# Altium PCB Mounting_PCB_B.PcbDoc
Units mm, origin at the board's own origin, x right, y up, seen from the top; angles counter-clockwise.
Board outline 41.5 x 73 mm, 2 copper layers (Top Layer, Bottom Layer), stack 0.325 mm thick; 70 components, 59 nets, 258 pads, 0 vias.
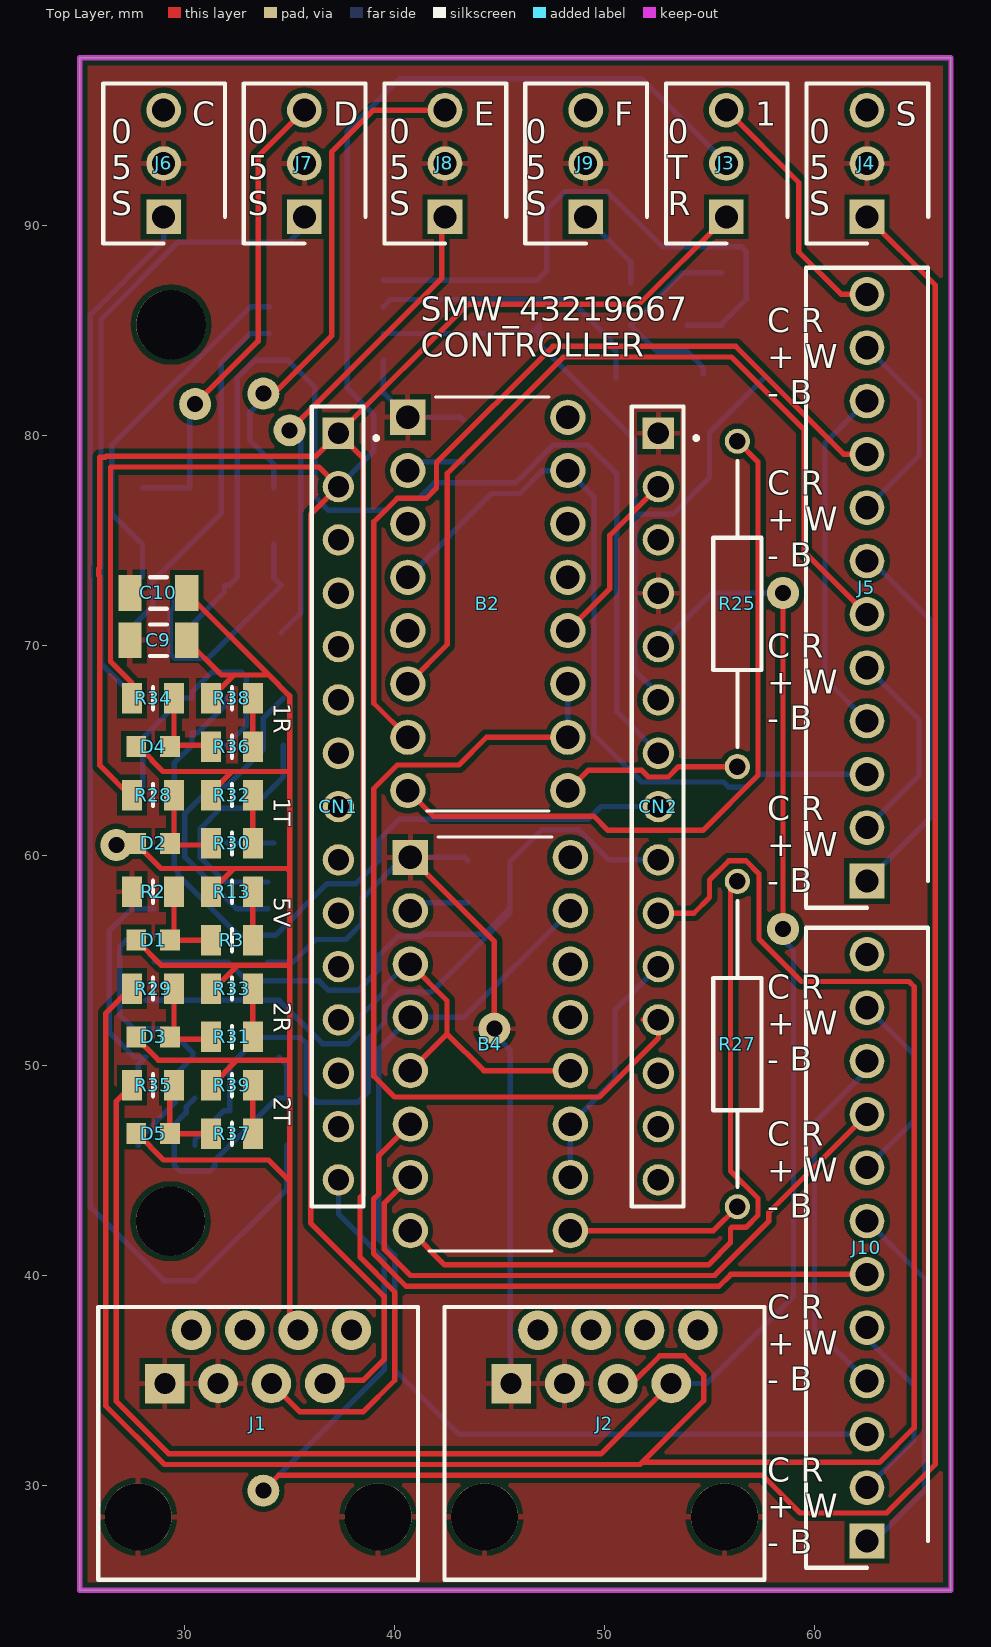
[diagram p0: Top Layer view]
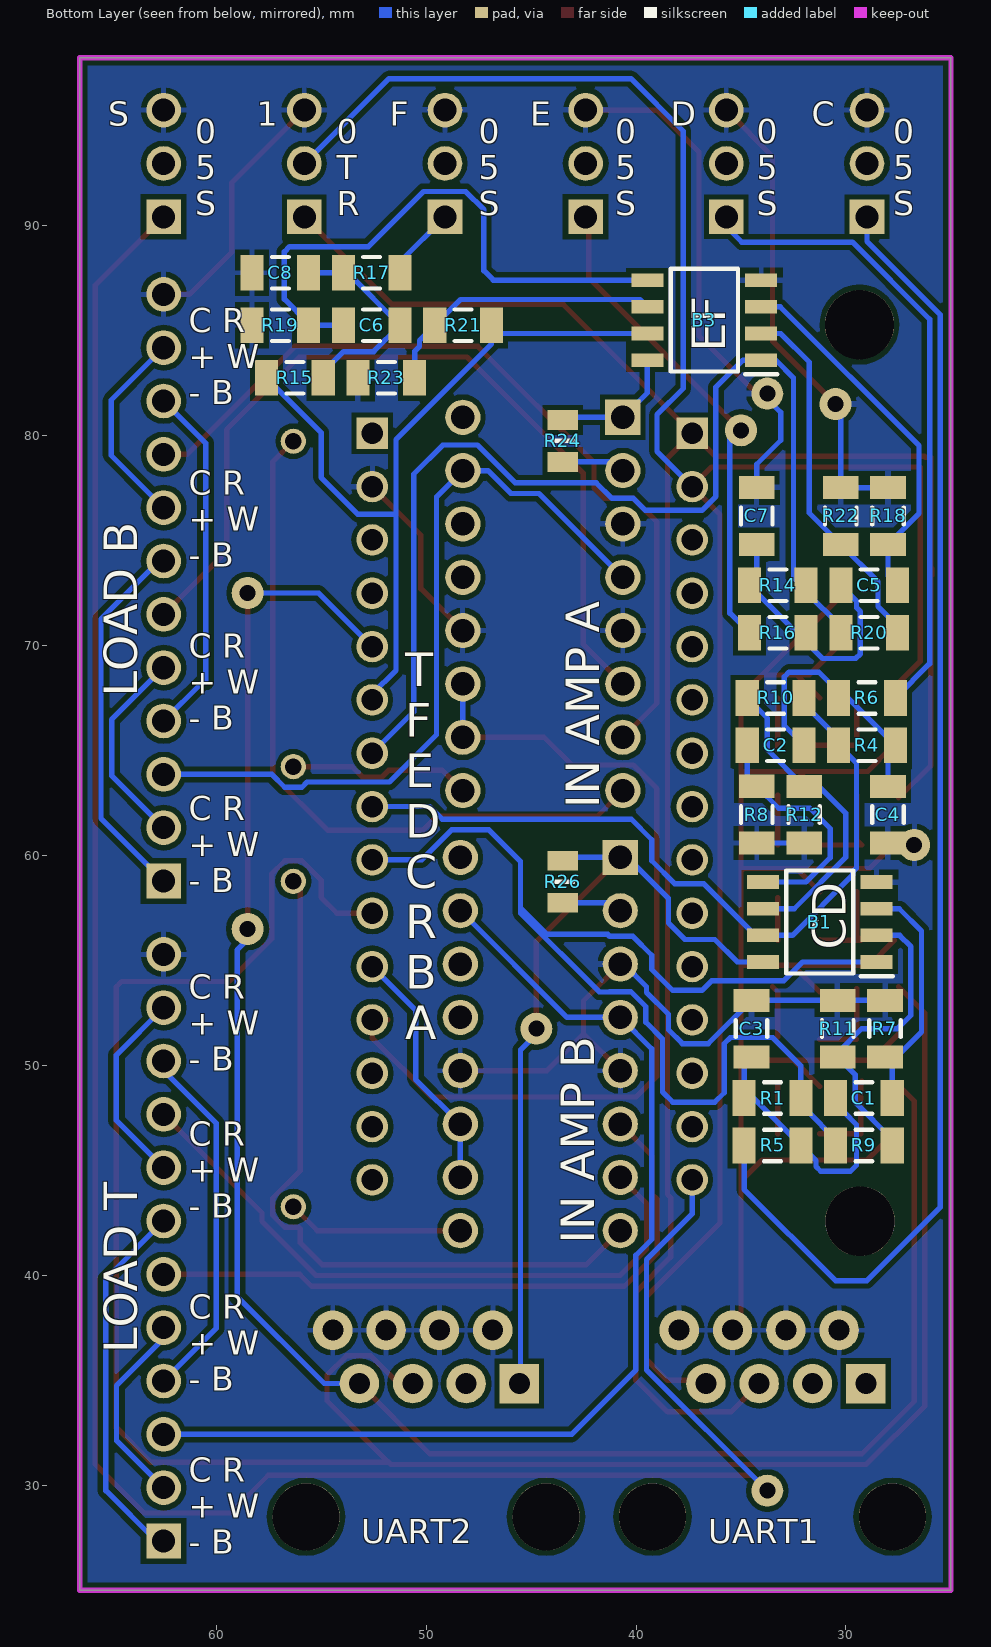
[diagram p1: Bottom Layer view, seen from below]

## Layer stack, top to bottom
Top Solder: solder mask 0.0102, Solder Resist, Dk 3.5
Top Layer: signal copper 0.0356
Dielectric 1: core 0.254, FR-4, Dk 4.2
Bottom Layer: signal copper 0.0356
Solder Side: solder mask 0.0102, Solder Resist, Dk 3.5

## Board outline
25,25 25,98 66.5,98 66.5,25

## Design rules (kind name [scope] priority, off if disabled: settings)
Clearance [All] p1: gap=0.254
PolygonConnect [All] p1: connectstyle=Relief reliefconductorwidth=0.254 reliefentries=4 polygonreliefangle="90 Angle" airgapwidth=0.254
RoomDefinition Mounting_PCB_Base [InComponentClass('Mounting_PCB_Base')] p1: confinementstyle=ConfineIn formatcopy=TRUE lockcomponents=FALSE outline 66.5,17 25,17 25,98 66.5,98
RoomDefinition Mounting_PCB_LED [InComponentClass('Mounting_PCB_LED')] p2: confinementstyle=ConfineIn formatcopy=TRUE lockcomponents=FALSE outline 25,17 66.5,17 66.5,98 25,98
RoutingVias [All] p1: holewidth=0.711 width=1.27 viastyle="Through Hole" minholewidth=0.711 minwidth=1.27 maxholewidth=0.711 maxwidth=1.27
SolderMaskExpansion [All] p1: expansion=0.102
Width [All] p1: maxlimit=0.254 minlimit=0.254 preferedwidth=0.254
30 further rules are at their usual default settings.

## Classes and differential pairs
component class Mounting_PCB_LED: D1 D2 D3 D4 D5 R2 R3 R13 R28 R29 R30 R31 R32 R33 R34 R35 R36 R37 R38 R39
component class Mounting_PCB_Base: B1 B2 B3 B4 C1 C2 C3 C4 C5 C6 C7 C8 C9 C10 CN1 CN2 J1 J2 J3 J4 J5 J6 J7 J8 J9 J10 R1 R4 R5 R6 R7 R8 R9 R10 R11 R12 R14 R15 R16 R17 R18 R19 R20 R21 R22 R23 R24 R25 R26 R27

## Components (designator, comment, footprint, x,y, rotation, side; value= is the part's Value field where it differs from the comment)
B1 "LM358AD" SOIC127P600X175-8N 31.25,56.829 r0 bottom
B2 "INA125PA" DIP254P762X508-16 48.25,63.09 r0 top
B3 "LM358AD" SOIC127P600X175-8N 36.75,85.5 r0 bottom
B4 "INA125PA" DIP254P762X508-16 48.37,42.13 r0 top
C1 "Cap 1206" C1206 29.146,48.446 r0 bottom
C2 "Cap 1206" C1206 33.354,65.25 r180 bottom
C3 "Cap 1206" C1206 34.5,51.75 r270 bottom
C4 "Cap 1206" C1206 28,61.941 r90 bottom
C5 "Cap 1206" C1206 28.896,72.866 r0 bottom
C6 "Cap 1206" C1206 52.591,85.254 r180 bottom
C7 "Cap 1206" C1206 34.25,76.171 r270 bottom
C8 "Cap 1206" C1206 56.946,87.759 r180 bottom
C9 "Cap 1206" C1206 28.75,70.25 r180 top
C10 "Cap 1206" C1206 28.75,72.504 r180 top
CN1 "Header 15X1_male" HDR_1x15_2R54_V_F 37.327,80.11 r270 top
CN2 "Header 15X1_male" HDR_1x15_2R54_V_F 52.567,80.11 r270 top
D1 "LED1" L0603 28.496,55.967 r180 top
D2 "LED1" L0603 28.496,60.576 r180 top
D3 "LED1" L0603 28.496,51.359 r180 top
D4 "LED1" L0603 28.496,65.184 r180 top
D5 "LED1" L0603 28.496,46.75 r180 top
J1 "3316437" RJ45-8 33.5,28.5 r0 top
J2 "3316437" RJ45-8 50,28.5 r0 top
J3 "22-27-2031" SHDR3W64P0X254_1X3_762X580X1170P 55.8,90.42 r90 top
J4 "22-27-2031" SHDR3W64P0X254_1X3_762X580X1170P 62.5,90.42 r90 top
J5 "22-27-2121" HDRV12W64P0X254_1X12_3048X580X1170P 62.5,58.784 r270 top
J6 "22-27-2031" SHDR3W64P0X254_1X3_762X580X1170P 29,90.42 r90 top
J7 "22-27-2031" SHDR3W64P0X254_1X3_762X580X1170P 35.7,90.42 r90 top
J8 "22-27-2031" SHDR3W64P0X254_1X3_762X580X1170P 42.4,90.42 r90 top
J9 "22-27-2031" SHDR3W64P0X254_1X3_762X580X1170P 49.1,90.42 r90 top
J10 "22-27-2121" HDRV12W64P0X254_1X12_3048X580X1170P 62.5,27.35 r270 top
R1 "Res2" C1206 33.5,48.446 r180 bottom
R2 "CRCW080510K0FKEA" RESC2012X50N 28.496,58.271 r0 top
R3 "CRCW080510K0FKEA" RESC2012X50N 32.25,55.967 r180 top
R4 "Res2" C1206 29,65.246 r0 bottom
R5 "Res2" C1206 33.5,46.191 r180 bottom
R6 "Res2" C1206 29,67.504 r0 bottom
R7 "Res2" C1206 28.144,51.75 r270 bottom
R8 "Res2" C1206 34.25,61.946 r90 bottom
R9 "Res2" C1206 29.146,46.192 r0 bottom
R10 "Res2" C1206 33.354,67.504 r180 bottom
R11 "Res2" C1206 30.398,51.75 r270 bottom
R12 "Res2" C1206 31.996,61.941 r90 bottom
R13 "CRCW080510K0FKEA" RESC2012X50N 32.25,58.271 r0 top
R14 "Res2" C1206 33.25,72.866 r180 bottom
R15 "Res2" C1206 56.25,82.75 r0 bottom
R16 "Res2" C1206 33.25,70.612 r180 bottom
R17 "Res2" C1206 52.591,87.759 r0 bottom
R18 "Res2" C1206 27.996,76.171 r270 bottom
R19 "Res2" C1206 56.946,85.254 r180 bottom
R20 "Res2" C1206 28.896,70.612 r0 bottom
R21 "Res2" C1206 48.237,85.25 r180 bottom
R22 "Res2" C1206 30.25,76.171 r270 bottom
R23 "Res2" C1206 51.896,82.75 r180 bottom
R24 "CRCW080510K0FKEA" RESC2012X50N 43.5,79.75 r270 bottom
R25 "7077666" RESAD1550W58L630D230 56.325,79.73 r270 top
R26 "CRCW080510K0FKEA" RESC2012X50N 43.5,58.75 r270 bottom
R27 "7077666" RESAD1550W58L630D230 56.325,58.77 r270 top
R28 "CRCW080510K0FKEA" RESC2012X50N 28.496,62.88 r0 top
R29 "CRCW080510K0FKEA" RESC2012X50N 28.496,53.663 r0 top
R30 "CRCW080510K0FKEA" RESC2012X50N 32.25,60.576 r180 top
R31 "CRCW080510K0FKEA" RESC2012X50N 32.25,51.359 r180 top
R32 "CRCW080510K0FKEA" RESC2012X50N 32.25,62.88 r0 top
R33 "CRCW080510K0FKEA" RESC2012X50N 32.25,53.663 r0 top
R34 "CRCW080510K0FKEA" RESC2012X50N 28.496,67.488 r0 top
R35 "CRCW080510K0FKEA" RESC2012X50N 28.496,49.054 r0 top
R36 "CRCW080510K0FKEA" RESC2012X50N 32.25,65.184 r180 top
R37 "CRCW080510K0FKEA" RESC2012X50N 32.25,46.75 r180 top
R38 "CRCW080510K0FKEA" RESC2012X50N 32.25,67.488 r0 top
R39 "CRCW080510K0FKEA" RESC2012X50N 32.25,49.054 r0 top

## Footprints (in the part's own frame and the unit in brackets; to place one, negate y for a bottom-side part, rotate by r counter-clockwise, add the part's x,y. Pads: shape width x height; smd on the part's side, far side on the other; paste and mask are expansions set on the pad)
C1206 [mm] "Chip Capacitor, Body 3.2x1.6mm, IPC High Density"
  rect 1.1x1.7 smd: 1(-1.35,0) 2(1.35,0)
  silkscreen extent -0.4,-0.75 0.4,0.75, body extent -1.7,-0.9 1.7,0.9, height 1.3
DIP254P762X508-16 [mil]
  rect 66x66 / inner round 66 / far side rect 66x66 hole 44: 1(-300,700)
  round 66 hole 44: 2(-300,600) 3(-300,500) 4(-300,400) 5(-300,300) 6(-300,200) 7(-300,100) 8(-300,0) 9(0,0) 10(0,100) 11(0,200) 12(0,300) 13(0,400) 14(0,500) 15(0,600) 16(0,700)
  silkscreen extent -265,-38 -35,738
HDR_1x15_2R54_V_F [mm] "Male Header, Pitch 2.54mm, 15x1 Position, Mated Height 6mm, Tail Length 3mm"
  rect 1.5x1.5 hole 1.02: 1(0,0)
  round 1.5 hole 1.02: 2(2.54,0) 3(5.08,0) 4(7.62,0) 5(10.16,0) 6(12.7,0) 7(15.24,0) 8(17.78,0) 9(20.32,0) 10(22.86,0) 11(25.4,0) 12(27.94,0) 13(30.48,0) 14(33.02,0) 15(35.56,0)
  silkscreen extent -1.27,-1.27 36.83,1.85, body extent -1.27,-1.27 36.83,1.27, height 12.7
HDRV12W64P0X254_1X12_3048X580X1170P [mm]
  rect 1.65x1.65 / inner round 1.65 / far side rect 1.65x1.65 hole 1.1: 1(0,0)
  round 1.65 hole 1.1: 2(-2.54,0) 3(-5.08,0) 4(-7.62,0) 5(-10.16,0) 6(-12.7,0) 7(-15.24,0) 8(-17.78,0) 9(-20.32,0) 10(-22.86,0) 11(-25.4,0) 12(-27.94,0)
  silkscreen extent -29.21,-2.9 1.27,2.9
L0603 [mm]
  rect 0.95x1 smd: 1(-0.8,0) 2(0.8,0)
RESAD1550W58L630D230 [mm]
  round 1.2 hole 0.8: 1(0,0) 2(15.5,0)
  silkscreen extent 0.95,-1.15 14.55,1.15
RESC2012X50N [mm]
  rect 0.95x1.45 smd: 1(-1,0) 2(1,0)
  silkscreen extent 0,-0.53 0,0.53
RJ45-8 [mil]
  round 125.98 hole 125.98: 1(-225,0) 1(225,0)
  rect 74x74 hole 39.37: 1(-175,250)
  round 74 hole 39.37: 2(-125,350) 3(-75,250) 4(-25,350) 5(25,250) 6(75,350) 7(125,250) 8(175,350)
  silkscreen extent -300,-118 300,394
SHDR3W64P0X254_1X3_762X580X1170P [mm]
  rect 1.65x1.65 / inner round 1.65 / far side rect 1.65x1.65 hole 1.1: 1(0,0)
  round 1.65 hole 1.1: 2(2.54,0) 3(5.08,0)
  silkscreen extent -1.27,-2.92 6.35,2.88
SOIC127P600X175-8N [mm]
  rect 1.525x0.65 smd: 1(-2.712,1.905) 2(-2.712,0.635) 3(-2.712,-0.635) 4(-2.712,-1.905) 5(2.712,-1.905) 6(2.712,-0.635) 7(2.712,0.635) 8(2.712,1.905)
  silkscreen extent -3.47,-2.45 1.6,2.58

## Part data
B1 B3: "LM358AD, Dual Operational Amplifier 1.1MHz 5 to 28V, 8-Pin SO"
B2 B4: "Instrumentation Amplifier with Precision Voltage Reference"
C1 C2 C3 C4 C5 C6 C7 C8 C9 C10: library part "Cap Semi", "Capacitor (Semiconductor SIM Model)"
CN1 CN2: library part "Header 15X1_Female_1", "Header, 10-Pin, Single row,female"
D1 D2 D3 D4 D5: "Typical RED GaAs LED"
J1 J2: "8/8 way r/a PCB lowprofile data skt,1.5A RS Pro Female Cat5 RJ45 Connector, Unshielded, Right Angle, PCB Mount Mount,"
J3 J4 J6 J7 J8 J9: "3way straight PCB header w/friction lock Molex KK Series, Series Number 6410, 2.54mm Pitch 3 Way 1 Row Straight PCB Header, Solder Termination, 4A"
J5 J10: "12way straightPCB header w/friction lock Molex KK Series, Series Number 6410, 2.54mm Pitch 12 Way 1 Row Straight PCB Header, Solder Termination, 4A"
R1 R4 R5 R6 R7 R8 R9 R10 R11 R12 R14 R15 R16 R17 R18 R19 R20 R21 R22 R23: "Resistor"
R2 R3 R13 R24 R26 R28 R29 R30 R31 R32 R33 R34 R35 R36 R37 R38 R39: "CRCW0805 Resistor T/R 0.125W,1%,10K Vishay CRCW Series Thick Film Surface Mount Resistor 0805 Case 10k 1% 0.125W 100ppm/C"
R25 R27: "RS Pro RS Series Axial Carbon Resistor 1k 5% 0.25W -500  +350ppm/C"

## Free pads (board coordinates)
  round 3.302 hole 3.302: 2(29.33,42.581) 2(29.355,85.285)
  round 1.524 hole 0.762: 4(35,80.25) 5(58.5,56.5) 6(58.5,72.5) 10(26.75,60.5) 11(33.75,82) 12(30.5,81.5) 13(44.75,51.75) 14(33.75,29.75)

## Nets (pads, with @x,y where several pads share a name; then routed paths per layer and width w, separated by ;. In a path a pad name is that pad's centre, name@x,y a point inside that pad or via, vN(x,y) a via of type N, cw(c..) or ccw(c..) an arc to the next point about the centre after c; other vN are vias at no path point)
+5V: B1.8 B2.1 B3.8 B4.1 C9.2 C10.2 CN2.1 CN2.4 J1.1 J1.3 J2.1 J2.3 J4.2 J6.2 J7.2 J8.2 J9.2 pad.13 R2.1 R24.1 R26.1 | length 45.4
  Top Layer w0.254: B4.1 44.75,55.91 pad.13
  Bottom Layer w0.254: B1.8 35.174,54.924 36.25,56 37.676,56 38.458,56.782 38.458,57.958 40.41,59.91 B4.1 43.34,59.91 R26.1 ; B3.8 39.462,82.038 B2.1 43.13,80.87 R24.1@43.25,80.75 ; pad.13@44.5,51.75 45.504,50.746 45.504,34.901 J2.1@45.555,34.85
A+_B: B4.6 J10.6 | length 31.3
  Top Layer w0.254: B4.6 39.25,45.71 39.25,43.888 38.992,43.63 38.992,41.04 40.548,39.484 55.452,39.484 56.018,40.05 J10.6
A+_T: B2.6 J5.6 | length 41.6
  Top Layer w0.254: B2.6 42.508,70.048 42.508,78.202 48.048,83.742 56.04,83.742 59.5,80.282 59.5,74.484 J5.6
A-_B: B4.7 J10.9 | length 30.9
  Top Layer w0.254: B4.7 39.5,43.42 39.5,41.25 40.758,39.992 55.242,39.992 57.814,42.564 57.814,42.984 J10.9
A-_T: B2.7 J5.9 | length 40.7
  Top Layer w0.254: B2.7 39.008,67.252 39.008,75.892 40.125,77.009 41.509,77.009 42,77.5 42,78.71 47.54,84.25 56.25,84.25 61.396,79.104 J5.9
ADC_A: B2.10 B2.11 CN2.12 | length 43.2
  Top Layer w0.254: B2.10 44.38,65.63 43.059,64.309 40.125,64.309 39.008,63.192 39.008,49.492 40,48.5 49.75,48.5 52.567,51.317 CN2.12 CN2.12@51.83,52.17
  Bottom Layer w0.254: B2.10 B2.11
ADC_B: B4.10 B4.11 CN2.11 | length 11.8
  Bottom Layer w0.254: B4.10 B4.11 50.5,49.34 50.5,52.643 CN2.11
ADC_C: B1.1 CN2.9 R1.2 R9.2 | length 57.1
  Bottom Layer w0.254: B1.1 32.076,54.924 32.969,54.031 36.406,54.031 36.858,53.579 38.25,53.579 39.25,54.579 39.25,55.25 40.151,56.151 41.255,56.151 41.354,56.25 44.25,56.25 45.5,57.5 ; R9.2 30.496,46.476 31.865,47.846 32.15,47.846 R1.2 32.15,50 32.161,50 33.492,51.331 35.508,51.331 35.8,51.039 35.8,48.7 36.25,48.25 38.25,48.25 38.742,48.742 38.742,51.267 39.531,52.056 39.531,52.795 40.245,53.509 41.255,53.509 41.264,53.5 41.75,53.5 45.5,57.25 45.5,57.5 ; CN2.9 50.214,59.79 48.783,61.222 47,61.222 45.5,59.722 45.5,57.5
ADC_D: B1.7 CN2.8 R4.2 R10.2 | length 36.9
  Bottom Layer w0.254: R10.2 32.004,67.22 30.635,65.85 30.35,65.85 R4.2 29.5,64.396 29.5,59.399 29.682,59.217 29.682,59.069 32.556,56.194 B1.7 34.318,56.194 36.783,58.659 38.159,58.659 39.25,59.75 39.25,60.75 40.23,61.73 49.23,61.73 49.83,62.33 CN2.8
ADC_E: B3.1 CN2.7 R14.2 R20.2 | length 53.6
  Bottom Layer w0.254: R20.2 30.246,70.897 31.9,72.551 R14.2 32.116,72.866 32.5,73.25 32.5,82.75 33.345,83.595 B3.1 34.905,83.595 36.196,82.304 36.196,77.102 36.858,76.439 39.555,76.439 40.125,77.009 41.135,77.009 41.144,77 41.894,77.75 45.75,77.75 47.549,79.549 49.201,79.549 50.588,78.162 50.588,66.849 CN2.7
ADC_F: B3.7 CN2.6 R15.2 R21.2 | length 37.9
  Bottom Layer w0.254: B3.7 46.502,84.865 R21.2 46.887,84.363 51.436,79.814 51.436,76.25 ; CN2.6 52.567,67.683 51.436,68.814 51.436,76.25 ; R15.2 55,80.15 55,78 53.25,76.25 51.436,76.25
E+_B: B4.4 B4.15 J10.3 | length 51.2
  Bottom Layer w0.254: B4.15 43.29,52.29 B4.4 39.25,50.79 39.25,41.718 40.008,40.96 40.008,35.492 43.07,32.43 J10.3
E+_T: B2.4 B2.15 J5.3 | length 37.1
  Bottom Layer w0.254: B2.4 44.622,77.242 45.96,77.242 47.048,78.33 B2.15 49.5,77.08 49.5,65.75 51.75,63.5 55.668,63.5 55.919,63.249 56.732,63.249 57.347,63.864 J5.3
GND: B1.4 B2.3 B2.5 B2.12 B3.4 B4.3 B4.5 B4.12 C3.1 C4.1 C7.1 C8.1 C9.1 C10.1 CN2.2 D1.2 D2.2 D3.2 D4.2 D5.2 J1.2 J1.4 J1.6 J1.8 J2.2 J2.4 J2.6 J2.8 J3.3 J4.3 J5.12 J6.3 J7.3 J8.3 J9.3 J10.12 pad.10 pad.11 pad.12 R7.1 R8.1 R11.1 R12.1 R13.1 R18.1 R19.1 R22.1 R23.1 R32.1 R33.1 R38.1 R39.1 | length 189.7
  Top Layer w0.254: pad.10@26.5,60.25 pad.10 ; D3.2@27.5,51.5 28.75,50.25 32.5,50.25 ; D1.2 28.894,54.769 32.519,54.769 ; D5.2@27.75,46.75 29,45.5 34,45.5 35,44.5 ; D2.2@27.75,60.5 28.873,59.377 32.356,59.377 ; D4.2@27.75,65.25 28.44,64.56 28.44,64.526 28.966,64 32.25,64 ; C9.1 31.756,68.594 32.344,68.594 ; C10.1 34.01,68.594 ; pad.12 33.5,84.5 33.5,93.3 J7.3 ; R39.1@31.25,49 32.5,50.25 ; R33.1@31.25,53.5 32.519,54.769 ; R13.1 32.356,59.377 ; R32.1@31.25,63 32.25,64 ; R38.1@31.25,67.5 32.344,68.594 ; J1.4 J1.4@33.25,37.775 ; pad.11 34,81.75 37,84.75 37,93.5 39,95.5 J8.3 ; J1.6 35,37.795 35,44.5 ; B4.5 42.5,51.5 ; B4.3 42.5,53.08 42.5,51.5 ; B2.12 50.25,72.71 50.25,75.253 CN2.2 ; B4.12 44.25,49.75 42.5,51.5 ; J3.3 59.25,92.05 59.25,88.75 61.276,86.724 J5.12 ; 32.25,64 35,64 ; 32.344,68.594 34.01,68.594 ; 32.356,59.377 34.873,59.377 35,59.25 ; 32.5,50.25 35,50.25 ; 32.519,54.769 34.981,54.769 35,54.75 ; 34.01,68.594 35,67.605 35,64 ; 35,44.5 35,50.25 ; 35,50.25 35,54.75 ; 35,54.75 35,59.25 ; 35,59.25 35,64
  Bottom Layer w0.254: R18.1 R22.1 pad.12@30.25,81.5 ; R7.1 R11.1 C3.1 36.561,51.039 37.795,51.039 38.458,51.702 38.458,52.44 39.5,53.483 39.5,53.75 40.58,54.83 B4.3 ; R12.1 32,60.596 R8.1 ; pad.11@34,82 33.107,81.107 33.107,79.777 34.25,78.634 C7.1
N1_B: J10.1 J10.7 | length 17.7
  Bottom Layer w0.254: J10.1 62.85,27.35 65.25,29.75 65.25,39.84 J10.7
N1_T: J5.1 J5.7 | length 17.8
  Bottom Layer w0.254: J5.1 65.484,61.768 65.484,71.266 62.726,74.024 J5.7
N2_B: J10.4 J10.10 | length 17.3
  Bottom Layer w0.254: J10.4 60,37.47 60,47.25 62.5,49.75 J10.10
N2_T: J5.4 J5.10 | length 17
  Bottom Layer w0.254: J5.4 60.654,68.25 60.5,68.25 60.5,79.644 J5.10
N3_B: J10.2 J10.5 | length 9.5
  Bottom Layer w0.254: J10.2 64.742,32.132 64.742,34.75 62.5,36.992 J10.5
N3_T: J5.2 J5.5 | length 9.7
  Bottom Layer w0.254: J5.2 64.976,63.8 64.976,66.468 J5.5
N4_B: J10.8 J10.11 | length 9.5
  Bottom Layer w0.254: J10.8 64.75,47.38 64.75,50.5 J10.11
N4_T: J5.8 J5.11 | length 9.7
  Bottom Layer w0.254: J5.8 65,79.064 65,81.684 J5.11
NetB2_2: B2.2 R24.2 | length 2.8
  Bottom Layer w0.254: B2.2 41.05,78.75 R24.2@43.25,78.75
NetB2_8: B2.8 R25.1 | length 34.9
  Top Layer w0.254: B2.8 41.849,61.871 49.5,61.871 50.172,61.199 54.682,61.199 57.306,63.824 57.306,78.749 R25.1
NetB2_9: B2.9 R25.2 | length 8.8
  Top Layer w0.254: B2.9 49.215,64.055 51.782,64.055 52.098,63.739 53.035,63.739 53.526,64.23 R25.2
NetB4_2: B4.2 R26.2 | length 2.9
  Bottom Layer w0.254: B4.2 41.13,57.75 R26.2
NetB4_8: B4.8 R27.1 | length 35.2
  Top Layer w0.254: B4.8 42.38,40.5 54.943,40.5 56,41.557 56,42.226 56.063,42.289 56.732,42.289 57.306,42.864 57.306,43.676 56,44.983 56,58.445 R27.1
NetB4_9: B4.9 R27.2 | length 8.4
  Top Layer w0.254: B4.9 55.185,42.13 R27.2
NetC1_2: C1.2 C3.2 R1.1 R5.2 | length 12.8
  Bottom Layer w0.254: C1.2 30.073,48.023 30.073,47.75 29.5,47.177 29.5,45.248 29.788,44.96 31.204,44.96 31.427,45.184 31.427,45.468 R5.2 34.404,48.446 R1.1 34.85,50.05 C3.2
NetC2_2: C2.2 C4.2 R4.1 R6.2 | length 12.1
  Bottom Layer w0.254: R4.1 29.909,67.504 R6.2 30.35,67.789 31.296,68.735 32.712,68.735 32.935,68.512 32.935,66.181 C2.2 ; C4.2 R4.1@28,64.738
NetC5_2: C5.2 C7.2 R14.1 R16.2 | length 12.6
  Bottom Layer w0.254: C5.2 29.5,72.121 29.5,71.805 29.315,71.62 29.315,69.604 29.538,69.381 31.115,69.381 R14.1 34.25,73.216 C7.2
NetC6_2: C6.2 C8.2 R15.1 R17.2 | length 10
  Bottom Layer w0.254: R15.1@54.7,82.95 54.7,83.235 53.935,84 52.496,84 C6.2 53.746,87.759 R17.2 C8.2
NetD1_1: D1.1 R2.2 R3.2 | length 4.4
  Top Layer w0.254: R2.2 29.496,56.167 D1.1 31.217,55.967 R3.2@31.25,56
NetD2_1: D2.1 R28.2 R30.2 | length 4.5
  Top Layer w0.254: R28.2 29.496,60.746 29.25,60.5 R30.2@31.25,60.5
NetD3_1: D3.1 R29.2 R31.2 | length 3.7
  Top Layer w0.254: D3.1@29.496,51.746 R29.2 ; D3.1@29.5,51.25 R31.2@31.25,51.25
NetD4_1: D4.1 R34.2 R36.2 | length 4.2
  Top Layer w0.254: R34.2 29.496,65.254 29.5,65.25 R36.2@31.5,65.25
NetD5_1: D5.1 R35.2 R37.2 | length 4.5
  Top Layer w0.254: R35.2@29.25,49.25 29.296,49.204 D5.1 R37.2
NetR3_1: R3.1 R13.2 | length 2
  Top Layer w0.254: R3.1 R13.2@33.25,58
NetR30_1: R30.1 R32.2 | length 2.4
  Top Layer w0.254: R30.1@33.25,60.5 R30.1 R32.2
NetR31_1: R31.1 R33.2 | length 2.5
  Top Layer w0.254: R31.1 33.25,53.5 R33.2@33.5,53.75
NetR36_1: R36.1 R38.2 | length 2.5
  Top Layer w0.254: R36.1@33.25,65 R36.1 R38.2
NetR37_1: R37.1 R39.2 | length 2.3
  Top Layer w0.254: R37.1 R39.2
SERVO: CN1.15 J4.1 pad.14 | length 112.9
  Top Layer w0.254: pad.14 34.481,30.481 57.519,30.481 59.316,28.684 63.434,28.684 65.75,31 65.75,87.17 J4.1
  Bottom Layer w0.254: pad.14 39.5,35.5 39.5,40.75 37.327,42.923 CN1.15
UART1_RX: CN1.2 J1.7 J3.2 R34.1 | length 108.6
  Top Layer w0.254: R34.1 27.496,68.216 26.469,69.242 26.469,78.5 36.397,78.5 CN1.2 36,76.243 36,42.5 39.5,39 39.5,36 38.5,35 36.825,35 J1.7
  Bottom Layer w0.254: CN1.2 39,79.243 39,81 37.75,82.25 37.75,94.5 40.25,97 51.76,97 J3.2 J3.2@55.8,92.8
UART1_TX: CN1.1 J1.5 J3.1 R28.1 | length 104.9
  Top Layer w0.254: R28.1@27.5,62.75 25.961,64.289 25.961,73.302 25.909,73.354 25.909,73.67 25.961,73.723 25.961,78.961 26.212,78.961 26.259,79.008 36.225,79.008 CN1.1 ; J1.5 35.485,33.5 38.5,33.5 40.008,35.008 40.008,39.21 38.351,40.867 38.351,43.708 38.5,43.857 38.5,78.937 CN1.1 ; J3.1 51.63,86.25 43.467,86.25 CN1.1
UART2_RX: CN2.10 J2.5 R29.1 | length 110.3
  Top Layer w0.254: R29.1@27.5,53.75 26.25,52.5 26.25,48.527 26.242,48.519 26.242,33.79 29.04,30.992 51.681,30.992 51.785,31.096 ; J2.5 51.307,34.85 52.628,36.171 53.796,36.171 54.717,35.25 54.717,34.028 51.785,31.096 ; CN2.10 54.25,57.25 55,58 55,58.832 55.919,59.751 56.732,59.751 57.357,59.126 57.357,56.027 59.384,54 64.5,54 64.75,53.75 64.75,32.75 63.096,31.096 51.785,31.096
  Bottom Layer w0.254: CN2.10 CN2.10@52.567,57.317
UART2_TX: CN2.5 J2.7 pad.5 pad.6 R35.1 | length 92
  Top Layer w0.254: R35.1 26.75,48.309 26.75,34 29.25,31.5 49.825,31.5 J2.7 ; pad.5 pad.6
  Bottom Layer w0.254: CN2.5 55.117,72.5 pad.6 ; J2.7 54.85,34.85 59,39 59,55.5 pad.5@58.5,56
V+C: B1.3 C1.1 R7.2 | length 11.7
  Bottom Layer w0.254: C1.1 27.796,50.052 R7.2 27.6,50.4 26.405,51.595 26.405,56.405 27.464,57.464 B1.3
V+D: B1.5 C2.1 R8.2 | length 11.6
  Bottom Layer w0.254: B1.5 31.914,58.734 30.75,59.898 30.75,61.285 31.715,62.25 33.204,62.25 R8.2 34.704,63.75 C2.1
V+E: B3.3 C5.1 R18.2 | length 17.7
  Bottom Layer w0.254: C5.1 27.996,73.316 R18.2 26.524,76.292 26.524,79.524 33.135,86.135 B3.3
V+F: B3.5 C6.1 R19.2 | length 27.6
  Bottom Layer w0.254: B3.5 46.799,87.405 47.25,87.856 47.25,90.759 48.117,91.626 50.124,91.626 52.75,89 56.5,89 56.75,88.75 56.75,86.5 55.596,85.346 R19.2 C6.1
V-C: B1.2 R9.1 R11.2 | length 14.8
  Bottom Layer w0.254: R9.1 27.796,46.481 29.565,48.25 29.565,49.566 R11.2 30.398,50.602 29.25,51.75 27.555,51.75 26.913,52.392 26.913,55.663 27.444,56.194 B1.2
V-D: B1.6 R10.1 R12.2 | length 14.9
  Bottom Layer w0.254: B1.6 32.466,57.464 30.008,59.922 30.008,62.008 31.291,63.291 R12.2 33.75,65.046 33.75,66.55 R10.1
V-E: B3.2 R20.1 R22.2 | length 17.5
  Bottom Layer w0.254: R20.1 27.546,70.928 28.477,71.859 28.477,73.047 R22.2 31.75,76.321 31.75,83.5 33.115,84.865 B3.2
V-F: B3.6 R21.1 R23.2 | length 13.7
  Bottom Layer w0.254: B3.6 39.808,86.481 48.356,86.481 R21.1 50.31,84.527 50.31,84.246 50.546,84.011 R23.2
VINC: J6.1 R5.1 | length 63.3
  Bottom Layer w0.254: J6.1 29,89.242 25.508,85.75 25.508,43.25 29.008,39.75 30.5,39.75 34.85,44.1 R5.1
VIND: J7.1 R6.1 | length 30.7
  Bottom Layer w0.254: R6.1 26.016,69.138 26.016,85.54 29.69,89.214 34.964,89.214 35.7,89.95 J7.1
VINE: J8.1 pad.4 R16.1 | length 23.7
  Top Layer w0.254: pad.4 42.25,87.5 42.25,90.27 J8.1
  Bottom Layer w0.254: R16.1 35.531,71.543 35.531,79.969 35.125,80.375 pad.4
VINF: J9.1 R17.1 | length 4
  Bottom Layer w0.254: J9.1 51.241,88.279 R17.1 R17.1@51.241,87.259
pads on no net: B2.13 B2.14 B2.16 B4.13 B4.14 B4.16 CN1.3 CN1.4 CN1.5 CN1.6 CN1.7 CN1.8 CN1.9 CN1.10 CN1.11 CN1.12 CN1.13 CN1.14 CN2.3 CN2.13 CN2.14 CN2.15

## Polygon pours and split planes (outlines as drawn)
+5V on Top Layer "+5V_L01_P007" (solid, remove dead copper, pour order 7): 25,25 25,98 66.5,98 66.5,25
GND on Bottom Layer "GND_L02_P008" (solid, remove dead copper, pour order 8): 25,25 25,98 66.5,98 66.5,25

## Keep-outs
Keep-Out Layer:
  the board outline again, w0.254

## Silkscreen, mask and mechanical layers (free items; w line width, h text height)
Top Overlay:
  text "C" at 30.369,94.75 h1.14
  text "D" at 37.069,94.75 h1.14
  text "E" at 43.769,94.75 h1.14
  text "F" at 50.469,94.75 h1.14
  text "1" at 57.169,94.75 h1.14
  text "S" at 63.869,94.75 h1.14
  text "0 / 5 / S" at 26.5,90.5 h1.14
  text "0 / 5 / S" at 33,90.5 h1.14
  text "0 / 5 / S" at 39.75,90.5 h1.14
  text "0 / 5 / S" at 46.25,90.5 h1.14
  text "0 / T / R" at 53,90.5 h1.14
  text "0 / 5 / S" at 59.75,90.5 h1.14
  text "SMW_43219667 / CONTROLLER" at 41.25,83.75 h1.14
  text "C R / + W / - B" at 57.75,81.5 h1.14
  text "C R / + W / - B" at 57.75,73.75 h1.14
  text "1R" at 34.25,67.25 h0.8 r270
  text "C R / + W / - B" at 57.75,66 h1.14
  text "1T" at 34.25,62.75 h0.8 r270
  text "C R / + W / - B" at 57.75,58.25 h1.14
  text "5V" at 34.25,58 h0.8 r270
  text "2R" at 34.25,53 h0.8 r270
  text "C R / + W / - B" at 57.75,49.75 h1.14
  text "2T" at 34.25,48.5 h0.8 r270
  text "C R / + W / - B" at 57.75,42.75 h1.14
  text "C R / + W / - B" at 57.75,34.5 h1.14
  text "C R / + W / - B" at 57.75,26.75 h1.14
Bottom Overlay:
  text "C" at 31.639,94.75 h1.14
  text "D" at 38.339,94.75 h1.14
  text "E" at 45.039,94.75 h1.14
  text "F" at 51.739,94.75 h1.14
  text "1" at 58.058,94.75 h1.14
  text "S" at 65.139,94.75 h1.14
  text "0 / 5 / S" at 27.75,90.5 h1.14
  text "0 / 5 / S" at 34.25,90.5 h1.14
  text "0 / 5 / S" at 41,90.5 h1.14
  text "0 / 5 / S" at 47.5,90.5 h1.14
  text "0 / T / R" at 54.25,90.5 h1.14
  text "0 / 5 / S" at 61,90.5 h1.14
  text "EF" at 35.75,84 h1.6 r270
  text "C R / + W / - B" at 61.305,81.5 h1.14
  text "C R / + W / - B" at 61.305,73.75 h1.14
  text "LOAD B" at 63.75,67.568 h1.6 r270
  text "C R / + W / - B" at 61.305,66 h1.14
  text "IN AMP A" at 41.75,62.25 h1.6 r270
  text "C R / + W / - B" at 61.305,58.25 h1.14
  text "CD" at 30,55.5 h1.6 r270
  text "T / F / E / D / C / R / B / A" at 51,51.25 h1.6
  text "C R / + W / - B" at 61.305,49.75 h1.14
  text "C R / + W / - B" at 61.305,42.75 h1.14
  text "IN AMP B" at 42,41.5 h1.6 r270
  text "LOAD T" at 63.75,36.284 h1.6 r270
  text "C R / + W / - B" at 61.305,34.5 h1.14
  text "UART1" at 36.555,27.25 h1.14
  text "UART2" at 53.095,27.25 h1.14
  text "C R / + W / - B" at 61.305,26.75 h1.14